# Altium PCB Module.PcbDoc
Units mm, origin at the board's own origin, x right, y up, seen from the top; angles counter-clockwise.
Board outline 26.07 x 29.71 mm, 2 copper layers (Top Layer, Bottom Layer); 33 components, 26 nets, 143 pads, 51 vias.
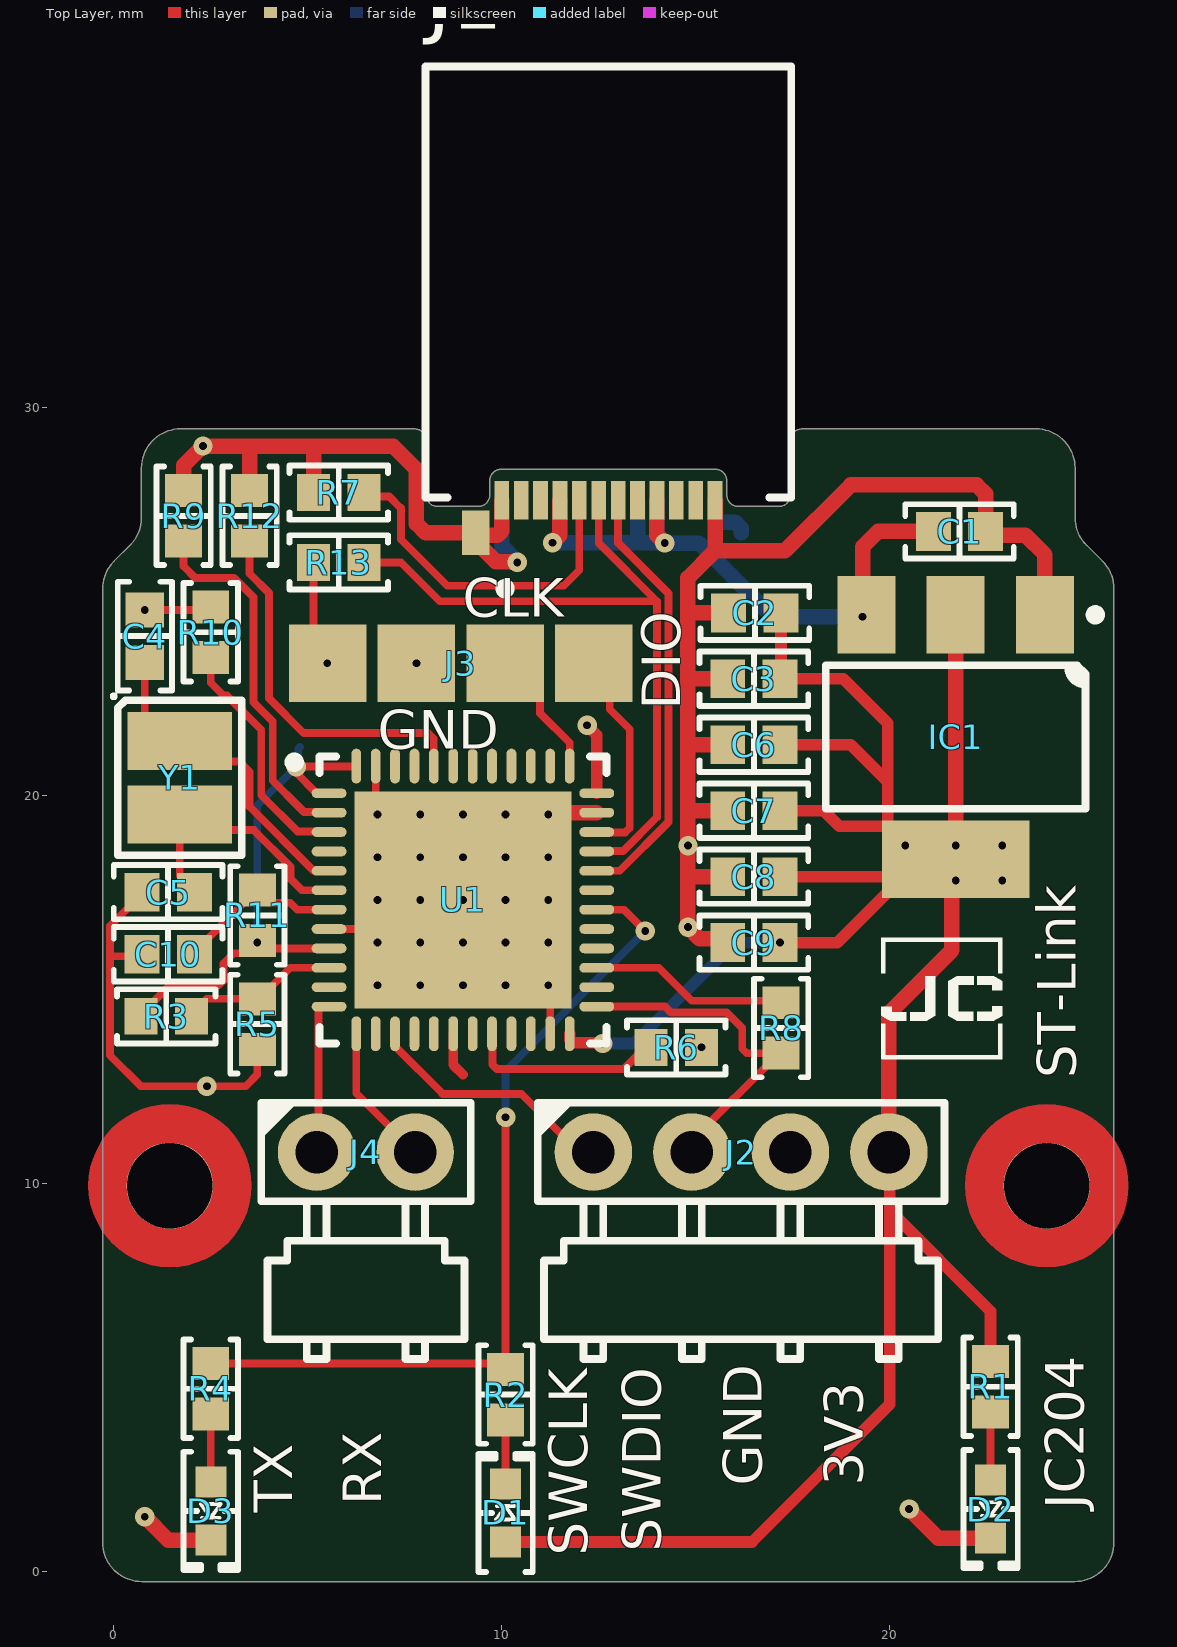
[diagram p0: Top Layer view]
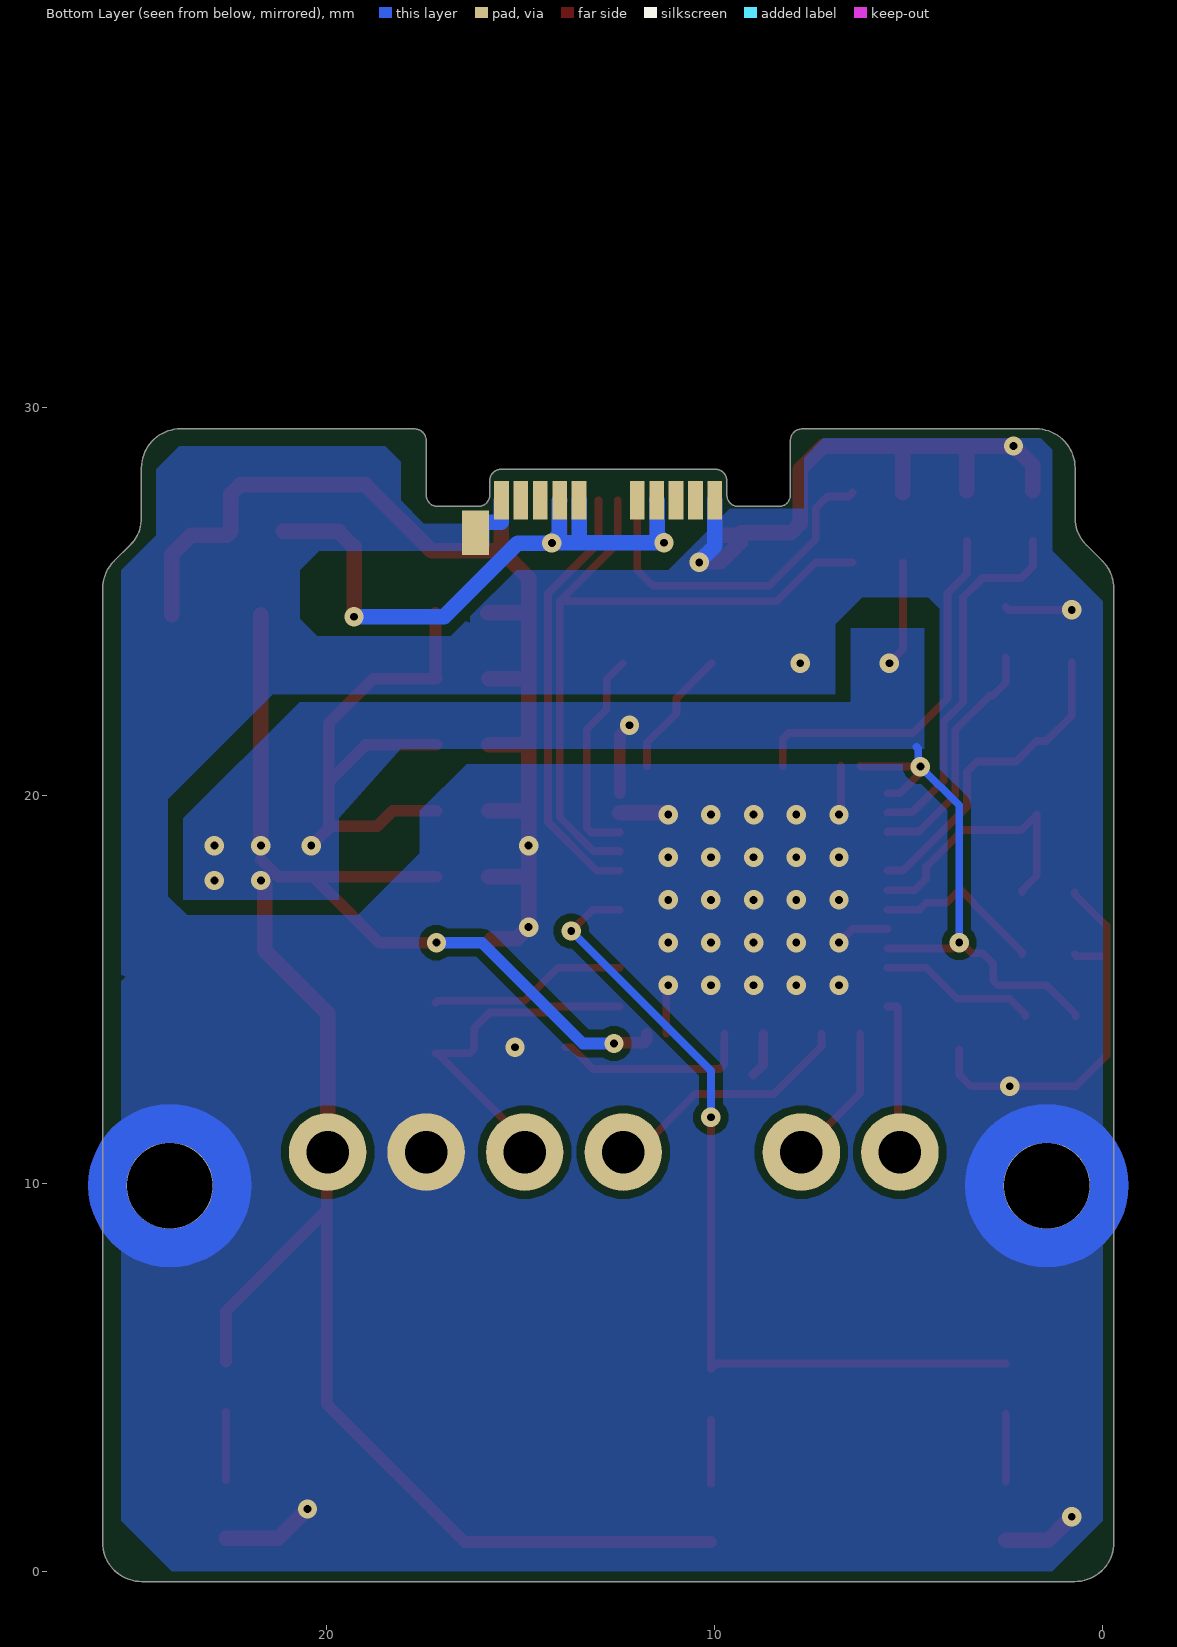
[diagram p1: Bottom Layer view, seen from below]
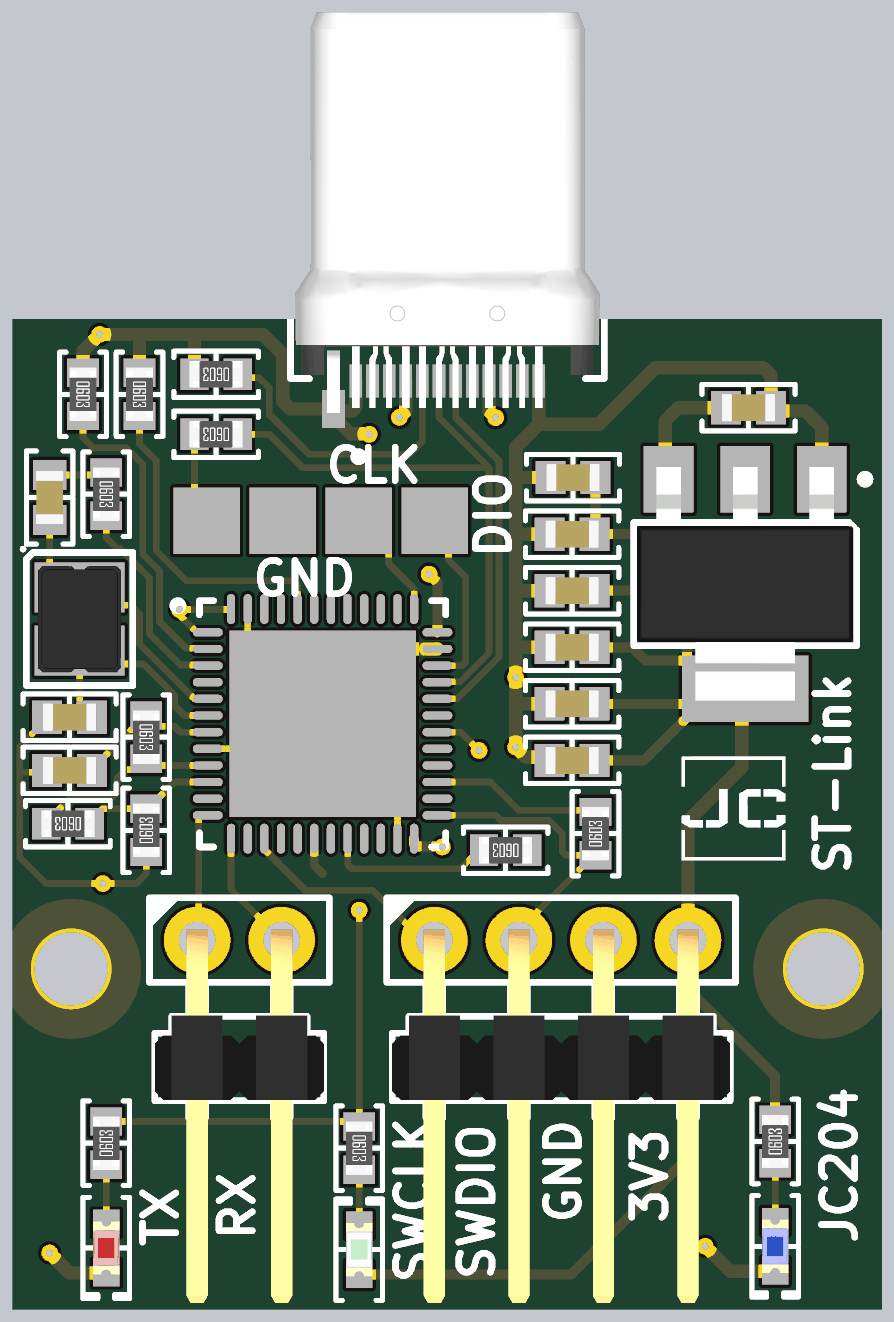
[diagram p2: 3D render of the assembled board from above, using the file's embedded part models]

## Layer stack, top to bottom
Top Solder: solder mask 0.0102, Solder Resist, Dk 3.5
Top Layer: signal copper 0.0356
Dielectric 1: dielectric 0.32, FR-4, Dk 4.8
Bottom Layer: signal copper 0.0356
Bottom Solder: solder mask 0.0102, Solder Resist, Dk 3.5

## Board outline
-0.287,25.322 cw(c0.72,25.322) 0.008,26.034 0.422,26.448 ccw(c-0.28,27.151) 0.713,27.151 0.713,28.436 cw(c1.72,28.436) 1.72,29.443 7.746,29.443 cw(c7.746,29.136) 8.053,29.137 8.053,27.736 ccw(c8.346,27.736) 8.346,27.443 9.396,27.443 ccw(c9.396,27.736) 9.69,27.736 9.69,28.096 cw(c9.996,28.096) 9.996,28.403 15.496,28.403 cw(c15.496,28.096) 15.803,28.097 15.803,27.736 ccw(c16.096,27.736) 16.096,27.443 17.146,27.443 ccw(c17.146,27.736) 17.44,27.736 17.44,29.136 cw(c17.746,29.136) 17.746,29.443 23.772,29.443 cw(c23.772,28.436) 24.779,28.436 24.779,27.151 ccw(c25.772,27.151) 25.07,26.448 25.484,26.034 cw(c24.772,25.322) 25.779,25.322 25.779,0.736 cw(c24.772,0.736) 24.772,-0.27 0.72,-0.27 cw(c0.72,0.736) -0.287,0.736

## Design rules (kind name [scope] priority, off if disabled: settings)
Clearance [All] p1: gap=0.2 ignorepadtopadclearanceinfootprint=FALSE except(0: Arc-Hole Track-Hole SMDPad-Hole THPad-Hole Via-Hole Fill-Hole Poly-Hole Region-Hole Text-Hole; 0.1: Arc-Arc Arc-Track Arc-SMDPad Track-Track Track-SMDPad SMDPad-SMDPad; 0.3: Arc-THPad Track-THPad THPad-THPad)
MinimumSolderMaskSliver [All] p1: minsoldermaskwidth=0.1
PlaneConnect [All] p1: planeconnectstyle=Direct reliefexpansion=0.508 reliefentries=4 reliefconductorwidth=0.254 reliefairgap=0.254
PolygonConnect [All] p1: connectstyle=Direct reliefconductorwidth=0.254 reliefentries=4 polygonreliefangle="90 Angle" airgapwidth=0.254
RoutingVias [All] p1: holewidth=0.25 width=1.27 viastyle="Through Hole" minholewidth=0.15 minwidth=0.5 maxholewidth=0.5 maxwidth=2.54
SilkToSilkClearance [All] p1: silktosilkclearance=0.15
SolderMaskExpansion [All] p1: expansion=0.102 istentingtop=FALSE
Width [All] p1: maxlimit=2 minlimit=0.2 preferedwidth=0.2 minimp=50.000000 maximp=50.000000 favimp=50.000000
27 further rules are at their usual default settings.

## Classes and differential pairs
component class USBC: J1 R7
component class STLINK: C1 C2 C3 C4 C5 C6 C7 C8 C9 C10 D1 D2 D3 IC1 J2 J3 J4 R1 R2 R3 R4 R5 R6 R8 R9 R10 R11 R12 R13 U1 Y1

## Components (designator, comment, footprint, x,y, rotation, side; value= is the part's Value field where it differs from the comment)
C1 "10 µF" "CAP 0603_1608" 21.8,26.8 r180 top
C2 "10 µF" "CAP 0603_1608" 16.525,24.7 r0 top
C3 "10 µF" "CAP 0603_1608" 16.5,23 r0 top
C4 "30 pF" "CAP 0603_1608" 0.8,24.1 r270 top
C5 "30 pF" "CAP 0603_1608" 1.4,17.5 r0 top
C6 "0.1 µF" "CAP 0603_1608" 16.5,21.3 r0 top
C7 "0.1 µF" "CAP 0603_1608" 16.5,19.6 r0 top
C8 "0.1 µF" "CAP 0603_1608" 16.5,17.9 r0 top
C9 "0.1 µF" "CAP 0603_1608" 16.5,16.2 r0 top
C10 "0.1 µF" "CAP 0603_1608" 1.4,15.9 r0 top
D1 "Green" "LED 0603_1608 GREEN" 10.1,1.5 r90 top
D2 "Blue" "LED 0603_1608 BLUE" 22.6,1.6 r270 top
D3 "Red" "LED 0603_1608 RED" 2.5,1.55 r270 top
IC1 "LD1117AS33TR" "ST SOT-223" 21.7,21.5 r270 top
J1 "105444-0001" FP-105444-0001-MFG 12.75,33.23 r0 top
J2 "M20-9960445" "HARWIN M20-9960445" 16.17,10.8 r0 top
J3 "Debug TP" CAPC2121X00N 8.943,23.4 r90 top
J4 "M20-9960245" "HARWIN M20-9960245" 6.5,10.8 r0 top
R1 "100 Ohms" "RES 0603_1608" 22.6,4.75 r90 top
R2 "100 Ohms" "RES 0603_1608" 10.1,4.55 r270 top
R3 "4.7 kOhms" "RES 0603_1608" 1.35,14.3 r180 top
R4 "100 Ohms" "RES 0603_1608" 2.5,4.7 r90 top
R5 "4.7 kOhms" "RES 0603_1608" 3.7,14.1 r90 top
R6 "100 kOhms" "RES 0603_1608" 14.5,13.5 r180 top
R7 "5.1 kOhms" "RES 0603_1608" 5.8,27.8 r180 top
R8 "100 Ohms" "RES 0603_1608" 17.2,14 r90 top
R9 "10 kOhms" "RES 0603_1608" 1.8,27.2 r270 top
R10 "10 kOhms" "RES 0603_1608" 2.5,24.2 r270 top
R11 "100 kOhms" "RES 0603_1608" 3.7,16.9 r270 top
R12 "100 kOhms" "RES 0603_1608" 3.5,27.2 r270 top
R13 "1.5 kOhms" "RES 0603_1608" 5.8,26 r180 top
U1 "STM32F103CBU6" STM-UFQFPN48_N 9,17.3 r0 top
Y1 "8 MHz" "NDK NX3225GD" 1.7,20.45 r270 top

## Footprints (in the part's own frame and the unit in brackets; to place one, negate y for a bottom-side part, rotate by r counter-clockwise, add the part's x,y. Pads: shape width x height; smd on the part's side, far side on the other; paste and mask are expansions set on the pad)
"CAP 0603_1608" [mm] "Chip Capacitor, 2-Leads, Body 1.60x0.80mm, IPC Medium Density"
  rect 0.9x1 smd: 1(-0.675,0) 2(0.675,0)
  silkscreen extent -1.4,-0.7 1.4,0.7, body extent -0.8,-0.41 0.8,0.41, height 0.82
CAPC2121X00N [mm] "Chip Capacitor, 2-Leads, Body 2.10x2.10mm, IPC Medium Density"
  rect 2x2 smd: 1(0,3.429) 2(0,1.143) 3(0,-1.143) 4(0,-3.429)
  body extent -1.27,-4.7 1.27,4.7
FP-105444-0001-MFG [mm]
  rect 0.7x1.15 smd paste+0 mask+0: 1(-3.42,-6.47)
  rect 0.7x1.15 smd far side paste+0 mask+0: 2(3.42,-6.47)
  rect 0.38x1 smd paste+0 mask+0: A1(-2.75,-5.63) A2(-2.25,-5.63) A3(-1.75,-5.63) A4(-1.25,-5.63) A5(-0.75,-5.63) A6(-0.25,-5.63) A7(0.25,-5.63) A8(0.75,-5.63) A9(1.25,-5.63) A10(1.75,-5.63) A11(2.25,-5.63) A12(2.75,-5.63)
  rect 0.38x1 smd far side paste+0 mask+0: B1(2.75,-5.63) B2(2.25,-5.63) B3(1.75,-5.63) B4(1.25,-5.63) B5(0.75,-5.63) B8(-0.75,-5.63) B9(-1.25,-5.63) B10(-1.75,-5.63) B11(-2.25,-5.63) B12(-2.75,-5.63)
  silkscreen extent -4.71,-8.03 4.71,5.56, body extent -4.81,-7.14 4.81,5.66, height 0.25
"HARWIN M20-9960245" [mm] "2.54mm DIL PC TAIL PIN HEADER ASSEMBLY"
  round 2 hole 1.1: 1(-1.27,0) 2(1.27,0)
  silkscreen extent -2.7,-5.33 2.7,1.3, body extent -2.54,-10.9 2.54,0.32, height 2.54
"HARWIN M20-9960445" [mm] "2.54mm DIL PC TAIL PIN HEADER ASSEMBLY"
  round 2 hole 1.1: 1(-3.81,0) 2(-1.27,0) 3(1.27,0) 4(3.81,0)
  silkscreen extent -5.24,-5.33 5.24,1.3, body extent -5.08,-10.9 5.08,0.32, height 2.54
"LED 0603_1608 BLUE" [mm] "Chip Diode, 2-Leads, Body 1.60x0.80mm, IPC Medium Density"
  rect 0.8x0.8 smd: 1(-0.75,0) 2(0.75,0)
  silkscreen extent -1.52,-0.7 1.52,0.7, body extent -0.8,-0.4 0.8,0.4, height 0.53
"LED 0603_1608 GREEN" [mm] "Chip Diode, 2-Leads, Body 1.60x0.80mm, IPC Medium Density"
  rect 0.8x0.8 smd: 1(-0.75,0) 2(0.75,0)
  silkscreen extent -1.52,-0.7 1.52,0.7, body extent -0.8,-0.4 0.8,0.4, height 0.53
"LED 0603_1608 RED" [mm] "Chip Diode, 2-Leads, Body 1.60x0.80mm, IPC Medium Density"
  rect 0.8x0.8 smd: 1(-0.75,0) 2(0.75,0)
  silkscreen extent -1.52,-0.7 1.52,0.7, body extent -0.8,-0.4 0.8,0.4, height 0.53
"NDK NX3225GD" [mm] "Crystal, 2-Leads, Body 2.50x3.20mm"
  rect 1.5x2.7 smd: 1(-0.95,0) 2(0.95,0)
  silkscreen extent -2.15,-1.75 2,1.6, body extent -1.6,-1.25 1.6,1.25, height 1
"RES 0603_1608" [mm] "Chip Resistor, 2-Leads, Body 1.60x0.80mm, IPC Medium Density"
  rect 0.85x0.95 smd: 1(-0.65,0) 2(0.65,0)
  silkscreen extent -1.27,-0.7 1.27,0.7, body extent -0.8,-0.4 0.8,0.4, height 0.45
"ST SOT-223" [mm] "SOT223, 4-Leads, Body 6.50x7.00mm (avg), Pitch 2.30mm, IPC Medium Density"
  rect 2x1.5 smd: 1(-3.15,2.3) 2(-3.15,0) 3(-3.15,-2.3)
  rect 2x3.8 smd: 4(3.15,0)
  silkscreen extent -3.27,-3.35 1.85,3.73, body extent -3.52,-3.25 3.5,3.25, height 1.8
STM-UFQFPN48_N [mm] "QFN, 48-Leads, Body 7.1x7.1mm, Pitch 0.5mm, Thermal Pad 5.6x5.6mm, IPC Medium Density"
  oval 0.9x0.25 smd: 1(-3.45,2.75) 2(-3.45,2.25) 3(-3.45,1.75) 4(-3.45,1.25) 5(-3.45,0.75) 6(-3.45,0.25) 7(-3.45,-0.25) 8(-3.45,-0.75) 9(-3.45,-1.25) 10(-3.45,-1.75) 11(-3.45,-2.25) 12(-3.45,-2.75) 25(3.45,-2.75) 26(3.45,-2.25) 27(3.45,-1.75) 28(3.45,-1.25) 29(3.45,-0.75) 30(3.45,-0.25) 31(3.45,0.25) 32(3.45,0.75) 33(3.45,1.25) 34(3.45,1.75) 35(3.45,2.25) 36(3.45,2.75)
  oval 0.25x0.9 smd: 13(-2.75,-3.45) 14(-2.25,-3.45) 15(-1.75,-3.45) 16(-1.25,-3.45) 17(-0.75,-3.45) 18(-0.25,-3.45) 19(0.25,-3.45) 20(0.75,-3.45) 21(1.25,-3.45) 22(1.75,-3.45) 23(2.25,-3.45) 24(2.75,-3.45) 37(2.75,3.45) 38(2.25,3.45) 39(1.75,3.45) 40(1.25,3.45) 41(0.75,3.45) 42(0.25,3.45) 43(-0.25,3.45) 44(-0.75,3.45) 45(-1.25,3.45) 46(-1.75,3.45) 47(-2.25,3.45) 48(-2.75,3.45)
  rect 5.6x5.6 smd: 49(0,0)
  silkscreen extent -4.47,-3.7 3.7,3.7, body extent -3.55,-3.55 3.55,3.55, height 0.6

## Part data
C1 C2 C3: library part GMC10X5R106M10NT, "CAP0603 X5R 10UF 20% 10V", Device Package="0603 (1608 Metric)", Manufacturer="Cal-Chip Electronics, Inc.", Operating Temperature="-55°C ~ 85°C", Supplier Part Number 1=4713-GMC10X5R106M10NTCT-ND, Temperature Coefficient=X5R, Tolerance=±20%, Voltage - Rated=10V, Applications="General Purpose", Capacitance="10 µF", ComponentLink1Description=Datasheet, ComponentLink1URL=https://88ce57.p3cdn1.secureserver.net/wp-content/uploads/2023/01/gmc_series-2.pdf, ComponentLink2Description="DigiKey Link", ComponentLink2URL=https://www.digikey.com/en/products/detail/cal-chip-electronics-inc/GMC10X5R106M10NT/18151101, lastupdated="2/9/2024 8:08:49 PM", Lifecycle Status=Active, Minimum Order=1, Mounting Type="Surface Mount, MLCC", Package / Case="0603 (1608 Metric)", Packaging=TapeAndReel, Part Number=GMC10X5R106M10NT, partid=55951, price=0.01, series=GMC, Size / Dimension="0.063\" L x 0.031\" W (1.60mm x 0.80mm)", Supplier 1=DigiKey, Thickness (Max)="0.039\" (1.00mm)"
C4 C5: library part 0603N300J500CT, "CAP CER 30PF 50V C0G/NP0 0603", Device Package="0603 (1608 Metric)", Manufacturer="Walsin Technology Corporation", Operating Temperature="-55°C ~ 125°C", Supplier Part Number 1=1292-1515-1-ND, Temperature Coefficient="C0G, NP0", Tolerance=±5%, Voltage - Rated=50V, Applications="General Purpose", Capacitance="30 pF", ComponentLink1Description=Datasheet, ComponentLink1URL=http://www.passivecomponent.com/wp-content/uploads/2018/10/MLCC.pdf, ComponentLink2Description="DigiKey Link", ComponentLink2URL=https://www.digikey.com/en/products/detail/walsin-technology-corporation/0603N300J500CT/9355012, lastupdated="2/9/2024 8:10:20 PM", Lifecycle Status=Active, Minimum Order=1, Mounting Type="Surface Mount, MLCC", Package / Case="0603 (1608 Metric)", Packaging=TapeAndReel, Part Number=0603N300J500CT, Part Status=Active, partid=9974, price=0.01, series=-, Size / Dimension="0.063\" L x 0.031\" W (1.60mm x 0.80mm)", Supplier 1=DigiKey, Thickness (Max)="0.034\" (0.87mm)"
C6 C7 C8 C9 C10: library part GMC10X7R104K25NT, "CAP0603 X7R .1UF 10% 25V", Device Package="0603 (1608 Metric)", Manufacturer="Cal-Chip Electronics, Inc.", Operating Temperature="-55°C ~ 125°C", Supplier Part Number 1=4713-GMC10X7R104K25NTCT-ND, Temperature Coefficient=X7R, Tolerance=±10%, Voltage - Rated=25V, Applications="General Purpose", Capacitance="0.1 µF", ComponentLink1Description=Datasheet, ComponentLink1URL=https://88ce57.p3cdn1.secureserver.net/wp-content/uploads/2023/01/gmc_series-2.pdf, ComponentLink2Description="DigiKey Link", ComponentLink2URL=https://www.digikey.com/en/products/detail/cal-chip-electronics-inc/GMC10X7R104K25NT/19910724, lastupdated="2/9/2024 8:08:39 PM", Lifecycle Status=Active, Minimum Order=1, Mounting Type="Surface Mount, MLCC", Package / Case="0603 (1608 Metric)", Packaging=TapeAndReel, Part Number=GMC10X7R104K25NT, partid=56631, price=0.01, series=GMC, Size / Dimension="0.063\" L x 0.031\" W (1.60mm x 0.80mm)", Supplier 1=DigiKey, Thickness (Max)="0.035\" (0.90mm)"
D1: library part 19-213/GVC-AMNB/3T, "LED GREEN CLEAR 2SMD", Current - Test=20mA, Device Package="0603 (1608 Metric)", Lens Color=Colorless, Manufacturer="Everlight Electronics Co Ltd", Supplier Device Package=2-SMD, Supplier Part Number 1=1080-1576-1-ND, Voltage - Forward (Vf) (Typ)=2.05V, Color=Green, ComponentLink1Description=Datasheet, ComponentLink1URL=//media.digikey.com/pdf/Data%20Sheets/Everlight%20PDFs/19-213-GVC-AMNB-3T.pdf, ComponentLink2Description="DigiKey Link", ComponentLink2URL=https://www.digikey.com/en/products/detail/everlight-electronics-co-ltd/19-213-GVC-AMNB-3T/8535270, Configuration=Standard, Height (Max)=0.70mm, lastupdated="6/3/2024 7:58:53 PM", Lens Size="1.20mm x 0.80mm", Lens Style="Rectangle with Flat Top", Lens Transparency=Clear, Lifecycle Status=Active, Minimum Order=1, Mounting Type="Surface Mount", Package / Case="0603 (1608 Metric)", Packaging=TapeAndReel, Part Number=19-213/GVC-AMNB/3T, Part Status=Active, partid=611, price=0.06, series=-, Size / Dimension="1.60mm L x 0.80mm W", Supplier 1=DigiKey, Viewing Angle=120°, Wavelength - Peak=568nm
D2: library part 19-217/B7C-ZL2N1B3X/3T, "LED BLUE CLEAR 2SMD", Current - Test=2mA, Device Package="0603 (1608 Metric)", Lens Color=Colorless, Manufacturer="Everlight Electronics Co Ltd", Supplier Device Package=2-SMD, Supplier Part Number 1=1080-1584-1-ND, Voltage - Forward (Vf) (Typ)=2.7V, Color=Blue, ComponentLink1Description=Datasheet, ComponentLink1URL=//media.digikey.com/pdf/Data%20Sheets/Everlight%20PDFs/19-217-B7C-ZL2N1B3X-3T.pdf, ComponentLink2Description="DigiKey Link", ComponentLink2URL=https://www.digikey.com/en/products/detail/everlight-electronics-co-ltd/19-217-B7C-ZL2N1B3X-3T/8535278, Configuration=Standard, Height (Max)=0.50mm, lastupdated="6/3/2024 7:57:52 PM", Lens Size="1.00mm x 0.80mm", Lens Style="Rectangle with Flat Top", Lens Transparency=Clear, Lifecycle Status=Active, Minimum Order=1, Mounting Type="Surface Mount", Package / Case="0603 (1608 Metric)", Packaging=TapeAndReel, Part Number=19-217/B7C-ZL2N1B3X/3T, Part Status=Active, partid=797, price=0.08, series=-, Size / Dimension="1.60mm L x 0.80mm W", Supplier 1=DigiKey, Viewing Angle=120°, Wavelength - Dominant=470nm, Wavelength - Peak=468nm
D3: library part 19-213SDRC/S259/TR8, "LED RED CLEAR 2SMD", Current - Test=10mA, Device Package="0603 (1608 Metric)", Lens Color=Colorless, Manufacturer="Everlight Electronics Co Ltd", Supplier Device Package=2-SMD, Supplier Part Number 1=1080-1580-1-ND, Voltage - Forward (Vf) (Typ)=2V, Color=Red, ComponentLink1Description=Datasheet, ComponentLink1URL=//media.digikey.com/pdf/Data%20Sheets/Everlight%20PDFs/19-213SDRC-S259-TR8.pdf, ComponentLink2Description="DigiKey Link", ComponentLink2URL=http://digikey.com/product-detail/en/everlight-electronics-co-ltd/19-213SDRC-S259-TR8/1080-1580-1-ND/8535303, Configuration=Standard, Height (Max)=0.70mm, lastupdated="6/3/2024 7:59:48 PM", Lens Size="1.20mm x 0.80mm", Lens Style="Rectangle with Flat Top", Lens Transparency=Clear, Lifecycle Status=Active, Minimum Order=1, Mounting Type="Surface Mount", Package / Case="0603 (1608 Metric)", Packaging=TapeAndReel, Part Number=19-213SDRC/S259/TR8, Part Status=Active, partid=372, price=0.06, series=-, Size / Dimension="1.60mm L x 0.80mm W", Supplier 1=DigiKey, Viewing Angle=120°, Wavelength - Peak=650nm
IC1: "IC REG LINEAR 3.3V 1A SOT223", Current - Output=1A, Current - Quiescent (Iq)="10 mA", Manufacturer=STMicroelectronics, Operating Temperature="0°C ~ 125°C", Package / Case="TO-261-4, TO-261AA", Supplier Device Package=SOT-223, Supplier Part Number 1=497-1228-1-ND, Voltage - Input (Max)=15V, Voltage - Output (Min/Fixed)=3.3V, Voltage Dropout (Max)="1.3V @ 1A", ComponentLink1Description=Datasheet, ComponentLink1URL=http://www.st.com/content/ccc/resource/technical/document/datasheet/a5/c3/3f/c9/2b/15/40/49/CD00002116.pdf/files/CD00002116.pdf/jcr:content/translations/en.CD00002116.pdf, ComponentLink2Description="DigiKey Link", ComponentLink2URL=https://www.digikey.com/en/products/detail/stmicroelectronics/LD1117AS33TR/585752, lastupdated="6/3/2024 8:14:21 PM", Lifecycle Status=Active, Minimum Order=1, Mounting Type="Surface Mount", Number of Regulators=1, Output Configuration=Positive, Output Type=Fixed, Packaging=TapeAndReel, Part Number=LD1117AS33TR, Part Status=Active, price=0.32, Protection Features="Over Current, Over Temperature", PSRR="75dB (120Hz)", series=-, Supplier 1=DigiKey
J1: library part CMP-04767-000023-1, "CONN PLUG USB3.1 TYPEC BRD EDGE", Current Rating=5A, Flammability Rating="UL94 V-0", Insulation Color=Black, Max Operating Temperature=85°C, Min Operating Temperature=-30°C, Connector Type=USB, Contact Material="Copper Alloy", Contact Plating=Gold, Features=Shielded, Gender=Male, Housing Material=Thermoplastic, Length=9.18mm, Mating Cycles=10000, Mount="Straddle Mount", Number of Contacts=24, Number of Pins=22, Number of Ports=1, Number of Terminals/Pins=22, Orientation="Right Angle", Packaging=Tray, Pitch=0.5mm, RoHS Compliant=Yes, series=105444, Shielding=Shielded, Termination=Solder, USB Standard="USB 3.1"
J2: "CONN HEADER R/A 4POS 2.54MM", Current Rating (Amps)="3A per Contact", Insulation Color=Black, Manufacturer="Harwin Inc.", Material Flammability Rating="UL94 V-0", Operating Temperature="-40°C ~ 105°C", Supplier Part Number 1=952-3286-ND, ComponentLink1Description=Datasheet, ComponentLink1URL=https://cdn.harwin.com/pdfs/Harwin_PC_Connectors_M20.pdf, ComponentLink2Description="DigiKey Link", ComponentLink2URL=https://www.digikey.com/en/products/detail/harwin-inc/M20-9960445/3921052, Connector Type="Header, Cuttable", Contact Finish - Mating=Gold, Contact Length - Mating="0.240\" (6.10mm)", Contact Length - Post="0.118\" (3.00mm)", Contact Material=Brass, Contact Shape=Square, Contact Type="Male Pin", Fastening Type=Push-Pull, Insulation Height="0.100\" (2.54mm)", Insulation Material="Polyamide (PA6T), Nylon 6T", lastupdated="9/21/2022 7:23:20 PM", Lifecycle Status=Active, Minimum Order=1, Mounting Type="Through Hole, Right Angle", Number of Positions=4, Number of Positions Loaded=All, Number of Rows=1, Packaging=Bulk, Part Number=M20-9960445, Part Status=Active, partid=167, Pitch - Mating="0.100\" (2.54mm)", price=0.11, Row Spacing - Mating="-40°C ~ 105°C", series=M20, Shrouding=Unshrouded, Style="Board to Board or Cable", Supplier 1=DigiKey, Termination=Solder
J3: library part CMP-00016-1, "ST-Link Test Point"
J4: "CONN HEADER R/A 2POS 2.54MM", Current Rating (Amps)="3A per Contact", Insulation Color=Black, Manufacturer="Harwin Inc.", Material Flammability Rating="UL94 V-0", Operating Temperature="-40°C ~ 105°C", Supplier Part Number 1=952-2244-ND, ComponentLink1Description=Datasheet, ComponentLink1URL=https://cdn.harwin.com/pdfs/Harwin_PC_Connectors_M20.pdf, ComponentLink2Description="DigiKey Link", ComponentLink2URL=https://www.digikey.com/en/products/detail/harwin-inc/M20-9960245/3728208, Connector Type="Header, Cuttable", Contact Finish - Mating=Gold, Contact Length - Mating="0.240\" (6.10mm)", Contact Length - Post="0.118\" (3.00mm)", Contact Material=Brass, Contact Shape=Square, Contact Type="Male Pin", Fastening Type=Push-Pull, Insulation Height="0.100\" (2.54mm)", Insulation Material="Polyamide (PA6T), Nylon 6T", lastupdated="9/21/2022 7:22:55 PM", Lifecycle Status=Active, Minimum Order=1, Mounting Type="Through Hole, Right Angle", Number of Positions=2, Number of Positions Loaded=All, Number of Rows=1, Packaging=Bulk, Part Number=M20-9960245, Part Status=Active, partid=165, Pitch - Mating="0.100\" (2.54mm)", price=0.07, Row Spacing - Mating="-40°C ~ 105°C", series=M20, Shrouding=Unshrouded, Style="Board to Board or Cable", Supplier 1=DigiKey, Termination=Solder
R1 R2 R4 R8: library part RCA0603100RJNEA, "RCA0603 100R 5% 200 ET1 E3", Device Package="0603 (1608 Metric)", Manufacturer="Vishay Dale", Operating Temperature="-55°C ~ 155°C", Power (Watts)="0.1W, 1/10W", Ratings=AEC-Q200, Supplier Device Package=0603, Supplier Part Number 1=541-RCA0603100RJNEACT-ND, Temperature Coefficient=±200ppm/°C, Tolerance=±5%, ComponentLink1Description=Datasheet, ComponentLink1URL=https://www.vishay.com/docs/20037/rcae3.pdf, ComponentLink2Description="DigiKey Link", ComponentLink2URL=https://www.digikey.com/en/products/detail/vishay-dale/RCA0603100RJNEA/19522959, Composition="Thick Film", Features="Anti-Sulfur, Automotive AEC-Q200", Height - Seated (Max)="0.020\" (0.50mm)", lastupdated="2/9/2024 8:40:41 PM", Lifecycle Status=Active, Minimum Order=1, Number of Terminations=2, Package / Case="0603 (1608 Metric)", Packaging=TapeAndReel, Part Number=RCA0603100RJNEA, Part Status=Active, partid=78145, price=0.01, Resistance="100 Ohms", series=RCA, Size / Dimension="0.061\" L x 0.033\" W (1.55mm x 0.85mm)", Supplier 1=DigiKey
R3 R5: library part ERA-3VRW4701V, "RES 4.7K OHM 0.05% 1/8W 0603", Device Package="0603 (1608 Metric)", Manufacturer="Panasonic Electronic Components", Operating Temperature="-55°C ~ 155°C", Power (Watts)="0.125W, 1/8W", Ratings=AEC-Q200, Supplier Device Package=0603, Supplier Part Number 1=10-ERA-3VRW4701VCT-ND, Temperature Coefficient=±10ppm/°C, Tolerance=±0.05%, ComponentLink1Description=Datasheet, ComponentLink1URL=https://api.pim.na.industrial.panasonic.com/file_stream/main/fileversion/9152, ComponentLink2Description="DigiKey Link", ComponentLink2URL=https://www.digikey.com/en/products/detail/panasonic-electronic-components/ERA-3VRW4701V/12086954, Composition="Thin Film", Features="Anti-Sulfur, Automotive AEC-Q200", Height - Seated (Max)="0.022\" (0.55mm)", lastupdated="2/9/2024 8:41:01 PM", Lifecycle Status=Active, Minimum Order=1, Number of Terminations=2, Package / Case="0603 (1608 Metric)", Packaging=TapeAndReel, Part Number=ERA-3VRW4701V, Part Status=Active, partid=71885, price=0.19, Resistance="4.7 kOhms", series=ERA-3V, Size / Dimension="0.063\" L x 0.031\" W (1.60mm x 0.80mm)", Supplier 1=DigiKey
R6 R11 R12: library part MCT0603MG1003BP500, "MCT 0603-05 0.1% AT P5 100K", Device Package="0603 (1608 Metric)", Manufacturer="Vishay Beyschlag/Draloric/BC Components", Operating Temperature="-55°C ~ 175°C", Power (Watts)=0.21W, Ratings=AEC-Q200, Supplier Device Package=0603, Supplier Part Number 1=749-MCT0603MG1003BP500CT-ND, Temperature Coefficient=±5ppm/°C, Tolerance=±0.1%, ComponentLink1Description=Datasheet, ComponentLink1URL=https://www.vishay.com/docs/28952/mcs0402at-mcs0603at-mcu0805at-mca1206at.pdf, ComponentLink2Description="DigiKey Link", ComponentLink2URL=https://www.digikey.com/en/products/detail/vishay-beyschlag-draloric-bc-components/MCT0603MG1003BP500/19251865, Composition="Thin Film", Features="Anti-Sulfur, Automotive AEC-Q200, Moisture Resistant", Height - Seated (Max)="0.022\" (0.55mm)", lastupdated="2/9/2024 8:40:40 PM", Lifecycle Status=Active, Minimum Order=1, Number of Terminations=2, Package / Case="0603 (1608 Metric)", Packaging=TapeAndReel, Part Number=MCT0603MG1003BP500, Part Status=Active, partid=78329, price=0.72, Resistance="100 kOhms", series="MCT AT - Precision", Size / Dimension="0.061\" L x 0.033\" W (1.55mm x 0.85mm)", Supplier 1=DigiKey
R7: library part TNPW06035K10BYEN, "RES 5.1K OHM 0.1% 1/10W 0603", Device Package="0603 (1608 Metric)", Manufacturer="Vishay Dale", Operating Temperature="-55°C ~ 155°C", Power (Watts)="0.125W, 1/8W", Ratings=AEC-Q200, Supplier Device Package=0603, Supplier Part Number 1=541-9831-1-ND, Temperature Coefficient=±10ppm/°C, Tolerance=±0.1%, ComponentLink1Description=Datasheet, ComponentLink1URL=http://www.vishay.com/docs/28758/tnpw_e3.pdf, ComponentLink2Description="DigiKey Link", ComponentLink2URL=http://digikey.com/product-detail/en/vishay-dale/TNPW06035K10BYEN/541-9831-1-ND/9562456, Composition="Thin Film", Features="Anti-Sulfur, Automotive AEC-Q200, Moisture Resistant", Height - Seated (Max)="0.022\" (0.55mm)", lastupdated="2/9/2024 8:43:35 PM", Lifecycle Status=Active, Minimum Order=1, Number of Terminations=2, Package / Case="0603 (1608 Metric)", Packaging=TapeAndReel, Part Number=TNPW06035K10BYEN, Part Status=Active, partid=5273, price=0.27, Resistance="5.1 kOhms", series="TNPW e3", Size / Dimension="0.061\" L x 0.033\" W (1.55mm x 0.85mm)", Supplier 1=DigiKey
R9 R10: library part MCT0603MG1002BP500, "MCT 0603-05 0.1% AT P5 10K", Device Package="0603 (1608 Metric)", Manufacturer="Vishay Beyschlag/Draloric/BC Components", Operating Temperature="-55°C ~ 175°C", Power (Watts)=0.21W, Ratings=AEC-Q200, Supplier Device Package=0603, Supplier Part Number 1=749-MCT0603MG1002BP500CT-ND, Temperature Coefficient=±5ppm/°C, Tolerance=±0.1%, ComponentLink1Description=Datasheet, ComponentLink1URL=https://www.vishay.com/docs/28952/mcs0402at-mcs0603at-mcu0805at-mca1206at.pdf, ComponentLink2Description="DigiKey Link", ComponentLink2URL=https://www.digikey.com/en/products/detail/vishay-beyschlag-draloric-bc-components/MCT0603MG1002BP500/19251868, Composition="Thin Film", Features="Anti-Sulfur, Automotive AEC-Q200, Moisture Resistant", Height - Seated (Max)="0.022\" (0.55mm)", lastupdated="2/9/2024 8:40:40 PM", Lifecycle Status=Active, Minimum Order=1, Number of Terminations=2, Package / Case="0603 (1608 Metric)", Packaging=TapeAndReel, Part Number=MCT0603MG1002BP500, Part Status=Active, partid=78314, price=0.72, Resistance="10 kOhms", series="MCT AT - Precision", Size / Dimension="0.061\" L x 0.033\" W (1.55mm x 0.85mm)", Supplier 1=DigiKey
R13: library part PTN0603Y1501BST1, "PTN0603 10PPM 1.5K 0.1% S T1 E1", Device Package="0603 (1608 Metric)", Manufacturer="Vishay Dale Thin Film", Operating Temperature="-55°C ~ 155°C", Power (Watts)=0.15W, Supplier Device Package=0603, Supplier Part Number 1=764-PTN0603Y1501BST1CT-ND, Temperature Coefficient=±10ppm/°C, Tolerance=±0.1%, ComponentLink1Description=Datasheet, ComponentLink1URL=https://www.vishay.com/docs/60026/ptn.pdf, ComponentLink2Description="DigiKey Link", ComponentLink2URL=https://www.digikey.com/en/products/detail/vishay-dale-thin-film/PTN0603Y1501BST1/12820673, Composition="Thin Film", Features="Anti-Sulfur, Moisture Resistant, Non-Inductive", Height - Seated (Max)="0.020\" (0.51mm)", lastupdated="2/9/2024 8:41:32 PM", Lifecycle Status=Active, Minimum Order=1, Number of Terminations=2, Package / Case="0603 (1608 Metric)", Packaging=TapeAndReel, Part Number=PTN0603Y1501BST1, Part Status=Active, partid=63062, price=0.27, Resistance="1.5 kOhms", series=PTN, Size / Dimension="0.064\" L x 0.032\" W (1.63mm x 0.81mm)", Supplier 1=DigiKey
U1: library part CMP-0237-00051-3, "ARM Cortex-M3 32-bit MCU, 128 KB Flash, 20 KB Internal RAM, 37 I/Os, 48-pin UFQFPN, -40 to 85 degC, Tray", I/Os (High Current)=37, Operating Frequency(F) (Processor speed) (MHz)=72, Supply Voltage(Vcc) min (V)=2, A/D Converter="2x12-bit (10 Channel)", ComponentLink1Description="Manufacturer URL", ComponentLink1URL=http://www.st.com/web/en/home.html, ComponentLink2Description=Datasheet, ComponentLink2URL=http://www.st.com/st-web-ui/static/active/en/resource/technical/document/datasheet/CD00161566.pdf, ComponentLink3Description="Package Specification", ComponentLink3URL=http://www.st.com/st-web-ui/static/active/en/resource/technical/document/data_brief/DM00071938.pdf, Core="ARM Cortex-M3", DatasheetVersion="Rev. 16", FLASH Size (Prog) (kB)=128, Internal RAM Size (kB)=20, Mounting Technology="Surface Mount", PackageDescription="48-Pin Ultra Thin Fine Pitch Quad Flat No-Lead, 7 x 7 x 0.6 mm Body, 0.5 mm Pitch, Exposed Pad", PackageReference=UFQFPN48, PackageVersion="Rev. 1, 04/2013", Packing=Tray, PartNumber=STM32F103CBU6
Y1: library part NX3225GD-8MHZ-EXS00A-CG04874, "CRYSTAL 8.0000MHZ 8PF SMD", ESR (Equivalent Series Resistance)="500 Ohms", Frequency Stability=±50ppm, Frequency Tolerance=±20ppm, Load Capacitance=8pF, Manufacturer="NDK America, Inc.", Operating Mode=Fundamental, Operating Temperature="-40°C ~ 150°C", Package / Case="2-SMD, No Lead", Ratings=AEC-Q200, Supplier Part Number 1=644-1391-1-ND, ComponentLink2Description="DigiKey Link", ComponentLink2URL=https://www.digikey.com/en/products/detail/ndk-america-inc/NX3225GD-8MHZ-EXS00A-CG04874/9172047, Frequency="8 MHz", Height - Seated (Max)="0.039\" (1.00mm)", lastupdated="6/3/2024 8:17:11 PM", Lifecycle Status=Active, Minimum Order=1, Mounting Type="Surface Mount", Packaging=TapeAndReel, Part Number=NX3225GD-8MHZ-EXS00A-CG04874, Part Status=Active, partid=746, price=0.37, series=NX3225GD, Size / Dimension="0.126\" L x 0.098\" W (3.20mm x 2.50mm)", Supplier 1=DigiKey, Type="MHz Crystal"

## Free pads (board coordinates)
  round 2.225 hole 2.2: 2(1.446,9.936) 2(24.046,9.936)

## Via types
v1: diameter 0.5, hole 0.2, Top Layer to Bottom Layer, 51 vias

## Nets (pads, with @x,y where several pads share a name; then routed paths per layer and width w, separated by ;. In a path a pad name is that pad's centre, name@x,y a point inside that pad or via, vN(x,y) a via of type N, cw(c..) or ccw(c..) an arc to the next point about the centre after c; other vN are vias at no path point)
3v3: C2.2 C3.2 C6.2 C7.2 C8.2 C9.2 D1.1 IC1.2 IC1.4 J2.4 J3.1 R1.2 R3.2 R11.2 R13.2 U1.1 U1.9 U1.24 U1.36 U1.48 | length 85.2
  Top Layer w0.2: R3.2 0.7,14.35 1.45,15.1 2.708,15.1 2.825,15.217 2.825,15.659 3.091,15.925 3.375,15.925 R11.2 ; v1(3.7,16.2) R11.2 ; R13.2 5.15,23.764 J3.1 ; U1.9 3.9,16.05 R11.2 ; U1.1 5.225,20.05 4.7,20.575 v1(4.7,20.737) 6.237,20.737 U1.48
  Top Layer w0.3: D1.1 16.45,0.75 20,4.3 20,9.3 ; U1.24 11.75,13.694 11.825,13.619 12.581,13.619 v1(12.6,13.6) ; v1(12.2,21.8) 12.45,21.55 U1.36 ; v1(17.175,16.2) 18.65,16.2 IC1.4@20.35,17.9 ; C8.2 19.2,17.9 IC1.4@20.35,17.9 ; C7.2 18.3,19.6 18.7,19.2 IC1.4@19.95,19.2 ; C6.2 19,21.3 19.95,20.35 ; C2.2 17.2,23.025 C3.2 18.8,23 19.95,21.85 19.95,20.35 ; J2.4 20,10.78 20,9.3 ; v1(20.4,18.7) 19.95,19.15 IC1.4@19.95,19.2 ; IC1.4 21.25,17.9 IC1.4@20.35,17.9 ; R1.2 22.6,6.7 20,9.3 ; IC1.4@19.95,19.2 19.95,20.35
  Top Layer w0.4: J2.4 19.98,14.38 21.6,16 21.6,17.7 v1(21.7,17.8) ; v1(21.7,18.7) IC1.2
  Bottom Layer w0.2: v1(3.7,16.2) 3.7,19.737 v1(4.7,20.737) 4.757,20.795 4.757,21.199 4.8,21.241
  Bottom Layer w0.3: v1(12.6,13.6) 13.4,13.6 16,16.2 v1(17.175,16.2)
  other v1: 22.9,17.8 22.9,18.7 5.5,23.4
BOOT0: R12.2 U1.44 | length 9.6
  Top Layer w0.2: R12.2 3.5,25.712 4,25.212 4,22.5 4.9,21.6 8.1,21.6 8.25,21.45 U1.44
BOOT1: R6.2 U1.20 | length 5.2
  Top Layer w0.2: U1.20 9.76,13.84 9.76,13.058 9.877,12.94 13.14,12.94 13.7,13.5 R6.2
GND: C1.1 C2.1 C3.1 C4.1 C5.1 C6.1 C7.1 C8.1 C9.1 C10.1 D2.2 D3.2 IC1.1 J1.1 J1.2 J1.A1 J1.A12 J1.B1 J1.B12 J2.3 J3.2 pad.2 R5.1 R6.1 R7.2 R9.1 R10.1 R12.1 U1.8 U1.23 U1.35 U1.47 U1.49 | length 70
  Top Layer w0.2: C10.1 0.675,15.85 -0.1,15.85 ; C5.1 0.725,17.45 -0.1,16.625 -0.1,15.85 ; v1(0.8,24.775) 2.425,24.775 R10.1 ; R5.1 3.7,12.8 3.4,12.5 v1(2.4,12.5) 0.7,12.5 -0.1,13.3 -0.1,15.85 ; U1.8 6.45,16.55 v1(6.8,16.2) ; U1.47 6.75,19.55 v1(6.8,19.5) ; v1(11.2,15.1) 11.25,15.05 U1.23
  Top Layer w0.4: v1(0.8,1.4) 1.4,0.8 D3.2 ; R9.1 1.8,28.5 v1(2.3,29) 3.5,29 ; R12.1 3.5,29 ; R7.2 5.15,29 ; J1.A1 10,26.817 9.883,26.7 9.39,26.7 J1.1 ; v1(10.4,26) 10.381,26.019 9.846,26.019 9.33,26.535 J1.1 ; v1(11.2,19.5) 11.25,19.55 U1.35 ; J1.A12 15.5,26.3 ; C9.1 15.725,16.3 15.1,16.3 v1(14.8,16.6) 14.8,17.8 ; C8.1 14.9,17.9 14.8,17.8 ; C7.1 14.8,19.6 ; C6.1 14.8,21.3 ; C3.1 14.8,23 ; C2.1 14.8,24.7 ; v1(20.5,1.6) 21.25,0.85 D2.2 ; IC1.1 24,26.2 23.5,26.7 22.575,26.7 C1.1 22.475,27.766 22.241,28 19,28 17.3,26.3 15.5,26.3 ; 3.5,29 5.15,29 ; 5.15,29 7.2,29 7.8,28.4 7.8,27 8.04,26.76 J1.1 ; 14.8,17.8 14.8,19.6 ; 14.8,19.6 14.8,21.3 ; 14.8,21.3 14.8,23 ; 14.8,23 14.8,24.7 ; 14.8,24.7 14.8,25.6 15.5,26.3
  Bottom Layer w0.4: J1.B12 10,26.427 10.4,26.027 v1(10.4,26) ; J1.B1 15.51,27.59 15.51,27.034 16.02,27.034 16.17,26.884 J1.2
  other v1: 15.15,13.5 6.8,15.1 7.9,15.1 9,15.1 10.1,15.1 7.9,16.2 9,16.2 10.1,16.2 11.2,16.2 6.8,17.3 7.9,17.3 9,17.3 10.1,17.3 11.2,17.3 6.8,18.4 7.9,18.4 9,18.4 10.1,18.4 11.2,18.4 14.8,18.7 7.9,19.5 9,19.5 10.1,19.5 7.8,23.4
LINK_LED: R2.1 R4.2 U1.30 | length 21.9
  Top Layer w0.2: R4.2 9.95,5.35 R2.1 v1(10.1,11.7) ; U1.30 13.15,17.05 v1(13.7,16.5)
  Bottom Layer w0.2: v1(10.1,11.7) 10.1,12.9 v1(13.7,16.5)
NetD1_2: D1.2 R2.2 | length 1.6
  Top Layer w0.2: D1.2 R2.2
NetD2_1: D2.1 R1.1 | length 1.7
  Top Layer w0.2: D2.1 R1.1
NetD3_1: D3.1 R4.1 | length 1.7
  Top Layer w0.2: D3.1 R4.1
OSCIN: C4.2 U1.5 Y1.1 | length 8.3
  Top Layer w0.2: C4.2 0.8,22.05 1.45,21.4 Y1.1 2.233,20.867 3.233,20.867 3.5,20.6 3.5,19.7 5.14,18.06 5.54,18.06 U1.5
OSCOT: C5.2 U1.6 Y1.2 | length 7
  Top Layer w0.2: C5.2 2.075,17.55 1.7,17.925 Y1.2 2.1,19.1 3.612,19.1 4.554,18.158 4.554,17.846 4.85,17.55 U1.6
PC13: R9.2 U1.2 | length 9.5
  Top Layer w0.2: R9.2 1.8,25.9 2.1,25.6 3.1,25.6 3.6,25.1 3.6,22.4 4.1,21.9 4.1,20.371 4.787,19.683 4.904,19.566 5.173,19.566 5.18,19.56 5.54,19.56 U1.2
PC14: R10.2 U1.3 | length 6.3
  Top Layer w0.2: R10.2 2.5,22.9 2.834,22.566 2.916,22.566 3.8,21.683 3.8,20 4.734,19.066 5.534,19.066 U1.3
RST: C10.2 R11.1 U1.7 | length 4.4
  Top Layer w0.2: C10.2 2.075,15.95 3.325,17.2 3.325,17.225 3.65,17.55 R11.1 4.025,17.225 4.551,17.225 4.726,17.05 U1.7
SWCLK: J3.3 U1.37 | length 3.3
  Top Layer w0.2: J3.3 10.986,22.5 10.986,22.114 11.75,21.35 U1.37
SWDIO: J3.4 U1.34 | length 5.5
  Top Layer w0.2: J3.4 12.783,22.989 12.783,22.217 13.3,21.7 13.3,19.158 13.183,19.04 12.46,19.04 U1.34
TRG_RST: U1.18 | length 1.2
  Top Layer w0.254: U1.18 8.75,13.05 9,12.8
TRG_SWCLK: J2.1 U1.15 | length 6.6
  Top Layer w0.2: U1.15 7.25,13.525 8.475,12.3 10.5,12.3 12,10.8 J2.1
TRG_SWDIO: J2.2 R8.1 U1.25 | length 9
  Top Layer w0.2: U1.25 14.211,14.55 14.361,14.4 15.8,14.4 16.2,14 16.2,13.467 16.317,13.35 R8.1@17.15,13.35 ; J2.2 14.9,11.1 R8.1@17.15,13.35 ; R8.1 R8.1@17.15,13.35
TRG_SWDO: R8.2 U1.27 | length 5.1
  Top Layer w0.2: U1.27 14.05,15.55 14.9,14.7 17.15,14.7 R8.2
UART1_RX: J4.2 U1.13 | length 3.7
  Top Layer w0.2: U1.13 6.25,12.32 J4.2
UART1_TX: J4.1 U1.12 | length 4
  Top Layer w0.2: J4.1 5.278,10.848 5.278,14.527 5.301,14.55 U1.12
USB_CC: J1.A5 R7.1 | length 9
  Top Layer w0.2: R7.1 6.55,27.7 7.1,27.7 7.4,27.4 7.4,26.6 8.6,25.4 11.6,25.4 12,25.8 J1.A5
USB_N: J1.A7 U1.32 | length 11.2
  Top Layer w0.2: U1.32 13.041,18.05 14.3,19.309 14.3,25.2 13,26.5 J1.A7
USB_P: J1.A6 R13.1 U1.33 | length 18.7
  Top Layer w0.2: R13.1 7.4,26 8.4,25 14,25 ; U1.33 12.46,18.56 13.126,18.56 14,19.433 14,25 ; J1.A6 12.5,26.5 14,25
USB_VBUS: C1.2 IC1.3 J1.A4 J1.A9 J1.B4 J1.B5 J1.B9 | length 18.4
  Top Layer w0.4: v1(11.31,26.51) 11.5,26.7 J1.A4 ; J1.A9 14,26.7 v1(14.2,26.5) ; v1(19.3,24.6) 19.3,26.4 19.7,26.8 C1.2
  Bottom Layer w0.4: J1.B9 11.49,27.59 11.49,26.717 11.31,26.537 v1(11.31,26.51) 11.314,26.505 13.5,26.505 ; J1.B5 13.5,26.505 ; J1.B4 14.01,27.59 14.01,26.717 14.2,26.527 v1(14.2,26.5) ; v1(19.3,24.6) 16.981,24.6 15.081,26.5 v1(14.2,26.5) ; 13.5,26.505 14.195,26.505 v1(14.2,26.5)
WKUP: R3.1 R5.2 U1.10 | length 4.1
  Top Layer w0.2: R3.1 2,14.35 2.4,14.75 R5.2 3.75,14.75 4.55,15.55 U1.10
pads on no net: J1.A2 J1.A3 J1.A8 J1.A10 J1.A11 J1.B2 J1.B3 J1.B8 J1.B10 J1.B11 U1.4 U1.11 U1.14 U1.16 U1.17 U1.19 U1.21 U1.22 U1.26 U1.28 U1.29 U1.31 U1.38 U1.39 U1.40 U1.41 U1.42 U1.43 U1.45 U1.46

## Polygon pours and split planes (outlines as drawn)
GND on Bottom Layer "GND_L02_P006" (solid, pour order 6): 16.3,24.607 16.807,24.1 20.25,24.1 21.6,25.45 21.6,22.6 17.7,22.6 16.3,22.6
GND on Bottom Layer "GND_L02_P005" (solid, pour order 5): 23.6,16.9 24.1,17.4 24.1,19.9 20.7,23.3 20.7,25.8 20.2,26.3 15.8,26.3 15.8,26.999 15.799,27 17.5,27 18.1,27.6 18.1,28.6 18.5,29 23.8,29 24.4,28.4 24.4,26.7 25.3,25.8 25.3,15.2
GND on Bottom Layer "GND_L02_P004" (solid, remove dead copper, pour order 4): 4.2,20.8 4.2,24.8 4.5,25.1 0.1,25.1 0,25 0,20.8 0,1.3 1.3,0 24,0 25.3,1.3 25.3,15.2 23.6,16.9 19.2,16.9 17.6,18.5 17.6,19.6 16.4,20.8
GND on Bottom Layer "GND_L02_P003" (solid, pour order 3): 7.7,27.384 9.616,27.384 11.2,25.8 15.107,25.8 16.3,24.607 16.3,22.6 6.9,22.6 6.9,24.4 6.2,25.1 4.5,25.1 3.4,24 3.4,18.6 0,18.6 0,25 1.3,26.3 1.3,28.907 1.593,29.2 7.2,29.2 7.7,28.7
3v3 on Bottom Layer "3V3_L02_P001" (solid, pour order 1): 4.6,22.3 4.6,24.3 6.5,24.3 6.5,22.3
3v3 on Bottom Layer "3V3_L02_P000" (solid, pour order 0): 19.7,19.4 19.7,17.3 23.7,17.3 23.7,19.4 20.7,22.4 4.6,22.4 4.6,21.2 18.1,21.2

## Other copper
Top Layer:
  region net GND: 1.446,7.836 cw(c1.446,9.936) -0.654,9.936 cw(c1.446,9.936) 1.446,12.036 cw(c1.446,9.936) 3.546,9.936 cw(c1.446,9.936)
  region net GND: 24.046,7.836 cw(c24.046,9.936) 21.946,9.936 cw(c24.046,9.936) 24.046,12.036 cw(c24.046,9.936) 26.146,9.936 cw(c24.046,9.936)
Bottom Layer:
  region net GND: 1.446,7.836 cw(c1.446,9.936) -0.654,9.936 cw(c1.446,9.936) 1.446,12.036 cw(c1.446,9.936) 3.546,9.936 cw(c1.446,9.936)
  region net GND: 24.046,7.836 cw(c24.046,9.936) 21.946,9.936 cw(c24.046,9.936) 24.046,12.036 cw(c24.046,9.936) 26.146,9.936 cw(c24.046,9.936)

## Silkscreen, mask and mechanical layers (free items; w line width, h text height)
Top Overlay:
  drawing of 7 lines, arcs and shapes, not listed
  text "CLK" at 9,24.6 h1
  text "DIO" at 14.6,22.2 h1 r90
  text "GND" at 6.8,21.2 h1
  text "ST-Link" at 24.8,12.7 h1 r90
  text "GND" at 16.7,2.2 h1 r90
  text "3V3" at 19.3,2.2 h1 r90
  text "RX" at 6.9,1.7 h1 r90
  text "JC204" at 25,1.6 h1 r90
  text "TX" at 4.6,1.5 h1 r90
  text "SWDIO" at 14.1,0.5 h1 r90
  text "SWCLK" at 12.2,0.4 h1 r90
Bottom Solder:
  drawing of 10 lines, arcs and shapes, not listed
Mechanical 1:
  circle w0.013: c24.046,9.936 r1.1
  circle w0.013: c1.446,9.936 r1.1
  lines w0.013: -0.28,0.736 ccw(c0.72,0.736) 0.72,-0.264 ; -0.28,0.736 ccw(c0.72,0.736) 0.72,-0.264 ; -0.28,0.736 -0.28,25.322 ; -0.28,0.736 -0.28,8.741 ; -0.28,8.741 ccw(c1.446,9.936) -0.28,11.132 ; -0.28,8.741 ccw(c1.446,9.936) -0.28,11.132 ; -0.28,11.132 -0.28,25.322 ; -0.28,25.322 cw(c0.72,25.322) 0.013,26.029 ; -0.28,25.322 cw(c0.72,25.322) 0.013,26.029 ; 0.013,26.029 0.427,26.444 ; 0.013,26.029 0.427,26.444 ; 0.427,26.444 ccw(c-0.28,27.151) 0.72,27.151 ; 0.427,26.444 ccw(c-0.28,27.151) 0.72,27.151 ; 0.72,-0.264 24.772,-0.264 ; 0.72,-0.264 24.772,-0.264 ; 0.72,27.151 0.72,28.436 ; 0.72,27.151 0.72,28.436 ; 0.72,28.436 cw(c1.72,28.436) 1.72,29.436 ; 0.72,28.436 cw(c1.72,28.436) 1.72,29.436 ; 1.72,29.436 7.746,29.436 ; 1.72,29.436 7.746,29.436 ; 7.746,29.436 cw(c7.746,29.136) 8.046,29.136 ; 7.746,29.436 cw(c7.746,29.136) 8.046,29.136 ; 8.046,27.736 ccw(c8.346,27.736) 8.346,27.436 ; 8.046,27.736 ccw(c8.346,27.736) 8.346,27.436 ; 8.046,27.736 8.046,29.136 ; 8.046,27.736 8.046,29.136 ; 8.346,27.436 9.396,27.436 ; 8.346,27.436 9.396,27.436 ; 9.396,27.436 ccw(c9.396,27.736) 9.696,27.736 ; 9.396,27.436 ccw(c9.396,27.736) 9.696,27.736 ; 9.696,27.736 9.696,28.096 ; 9.696,27.736 9.696,28.096 ; 9.696,28.096 cw(c9.996,28.096) 9.996,28.396 ; 9.696,28.096 cw(c9.996,28.096) 9.996,28.396 ; 9.996,28.396 15.496,28.396 ; 9.996,28.396 15.496,28.396 ; 15.496,28.396 cw(c15.496,28.096) 15.796,28.096 ; 15.496,28.396 cw(c15.496,28.096) 15.796,28.096 ; 15.796,27.736 ccw(c16.096,27.736) 16.096,27.436 ; 15.796,27.736 ccw(c16.096,27.736) 16.096,27.436 ; 15.796,27.736 15.796,28.096 ; 15.796,27.736 15.796,28.096 ; 16.096,27.436 17.146,27.436 ; 16.096,27.436 17.146,27.436 ; 17.146,27.436 ccw(c17.146,27.736) 17.446,27.736 ; 17.146,27.436 ccw(c17.146,27.736) 17.446,27.736 ; 17.446,27.736 17.446,29.136 ; 17.446,27.736 17.446,29.136 ; 17.446,29.136 cw(c17.746,29.136) 17.746,29.436 ; 17.446,29.136 cw(c17.746,29.136) 17.746,29.436 ; 17.746,29.436 23.772,29.436 ; 17.746,29.436 23.772,29.436 ; 23.772,29.436 cw(c23.772,28.436) 24.772,28.436 ; 23.772,29.436 cw(c23.772,28.436) 24.772,28.436 ; 24.772,-0.264 ccw(c24.772,0.736) 25.772,0.736 ; 24.772,-0.264 ccw(c24.772,0.736) 25.772,0.736 ; 24.772,27.151 ccw(c25.772,27.151) 25.065,26.444 ; 24.772,27.151 ccw(c25.772,27.151) 25.065,26.444 ; 24.772,27.151 24.772,28.436 ; 24.772,27.151 24.772,28.436 ; 25.065,26.444 25.48,26.029 ; 25.065,26.444 25.48,26.029 ; 25.48,26.029 cw(c24.772,25.322) 25.772,25.322 ; 25.48,26.029 cw(c24.772,25.322) 25.772,25.322 ; 25.772,0.736 25.772,25.322 ; 25.772,0.736 25.772,8.741 ; 25.772,8.741 cw(c24.046,9.936) 25.772,11.132 ; 25.772,8.741 cw(c24.046,9.936) 25.772,11.132 ; 25.772,11.132 25.772,25.322